# Altium PCB Machonap.PcbDoc
Units mil, origin at the board's own origin, x right, y up, seen from the top; angles counter-clockwise.
Board outline 3939.01 x 3151.6 mil, 2 copper layers (Top Layer, Bottom Layer), stack 62.205 mil thick; 26 components, 11 nets, 62 pads, 0 vias.
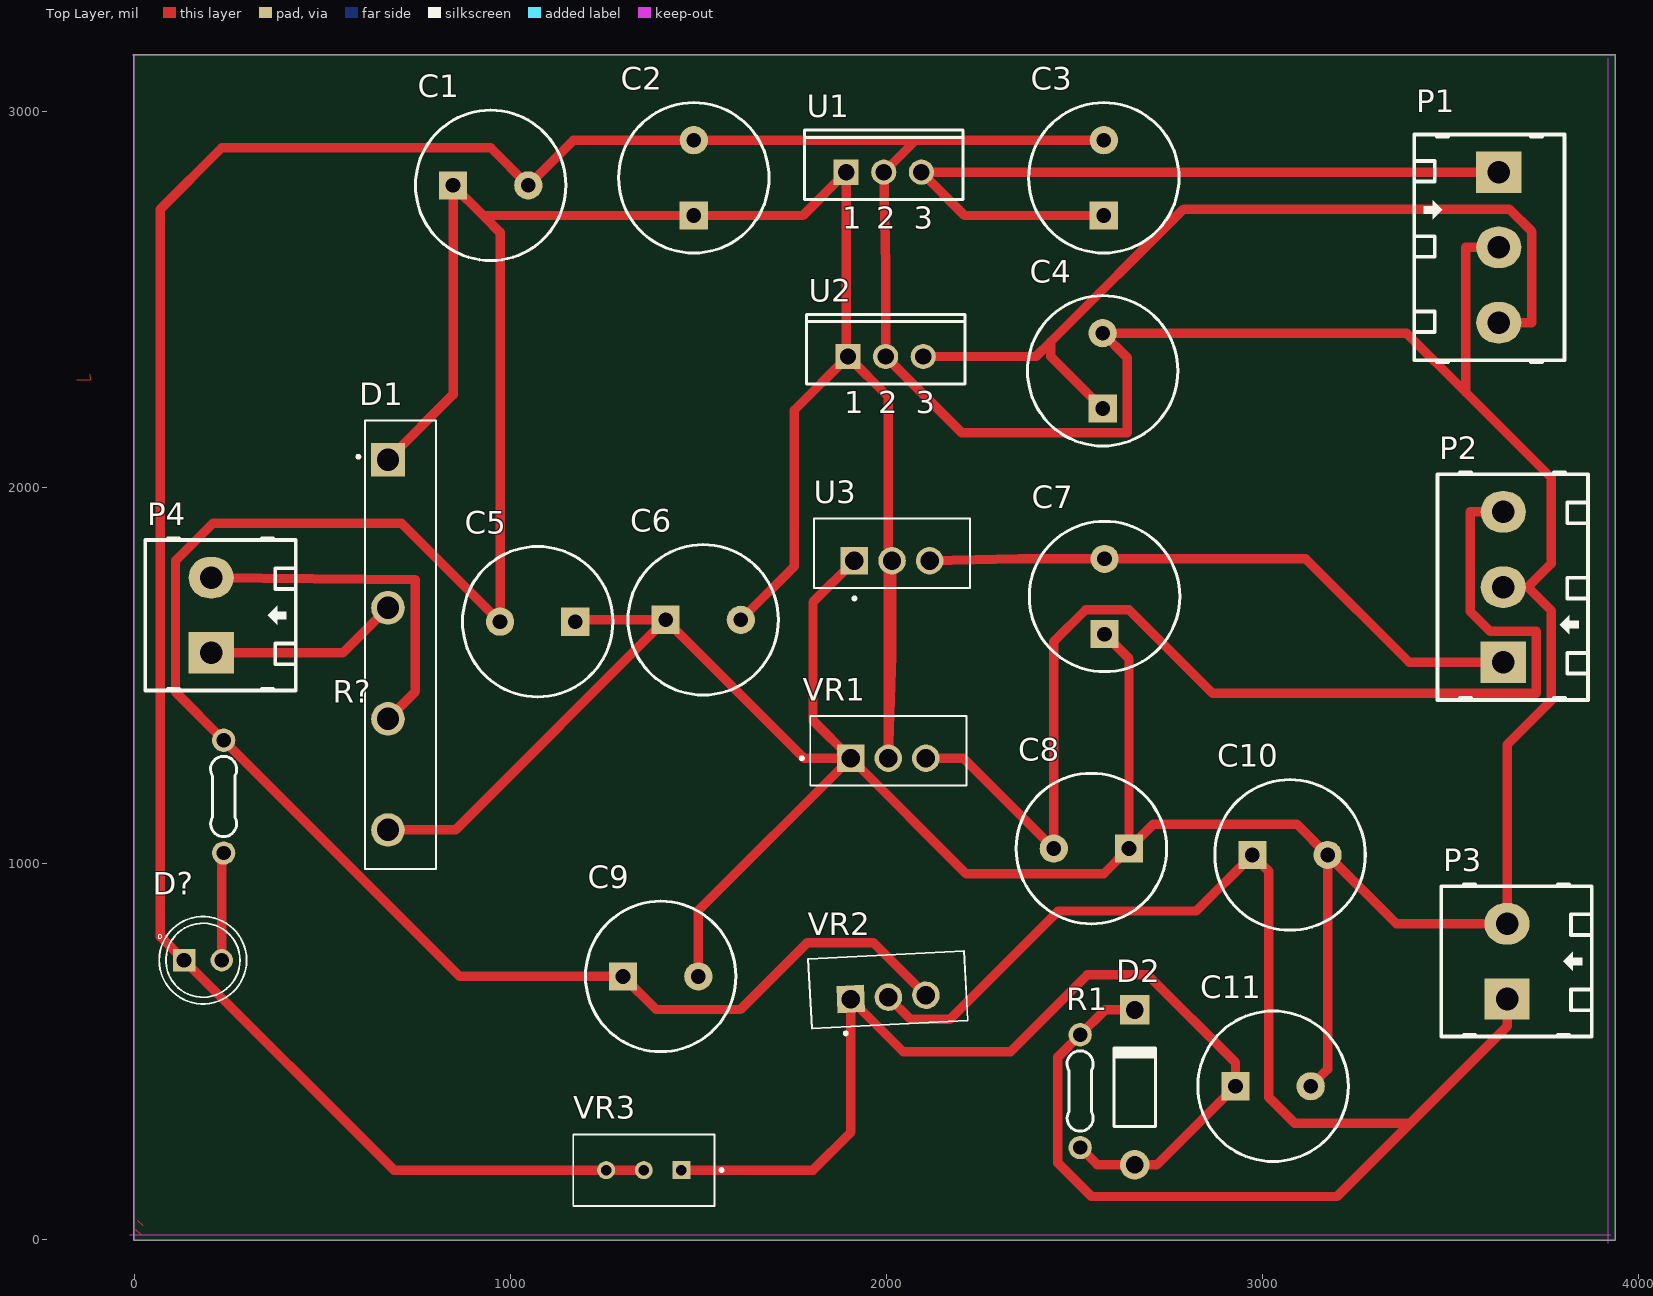
[diagram p0: Top Layer view]
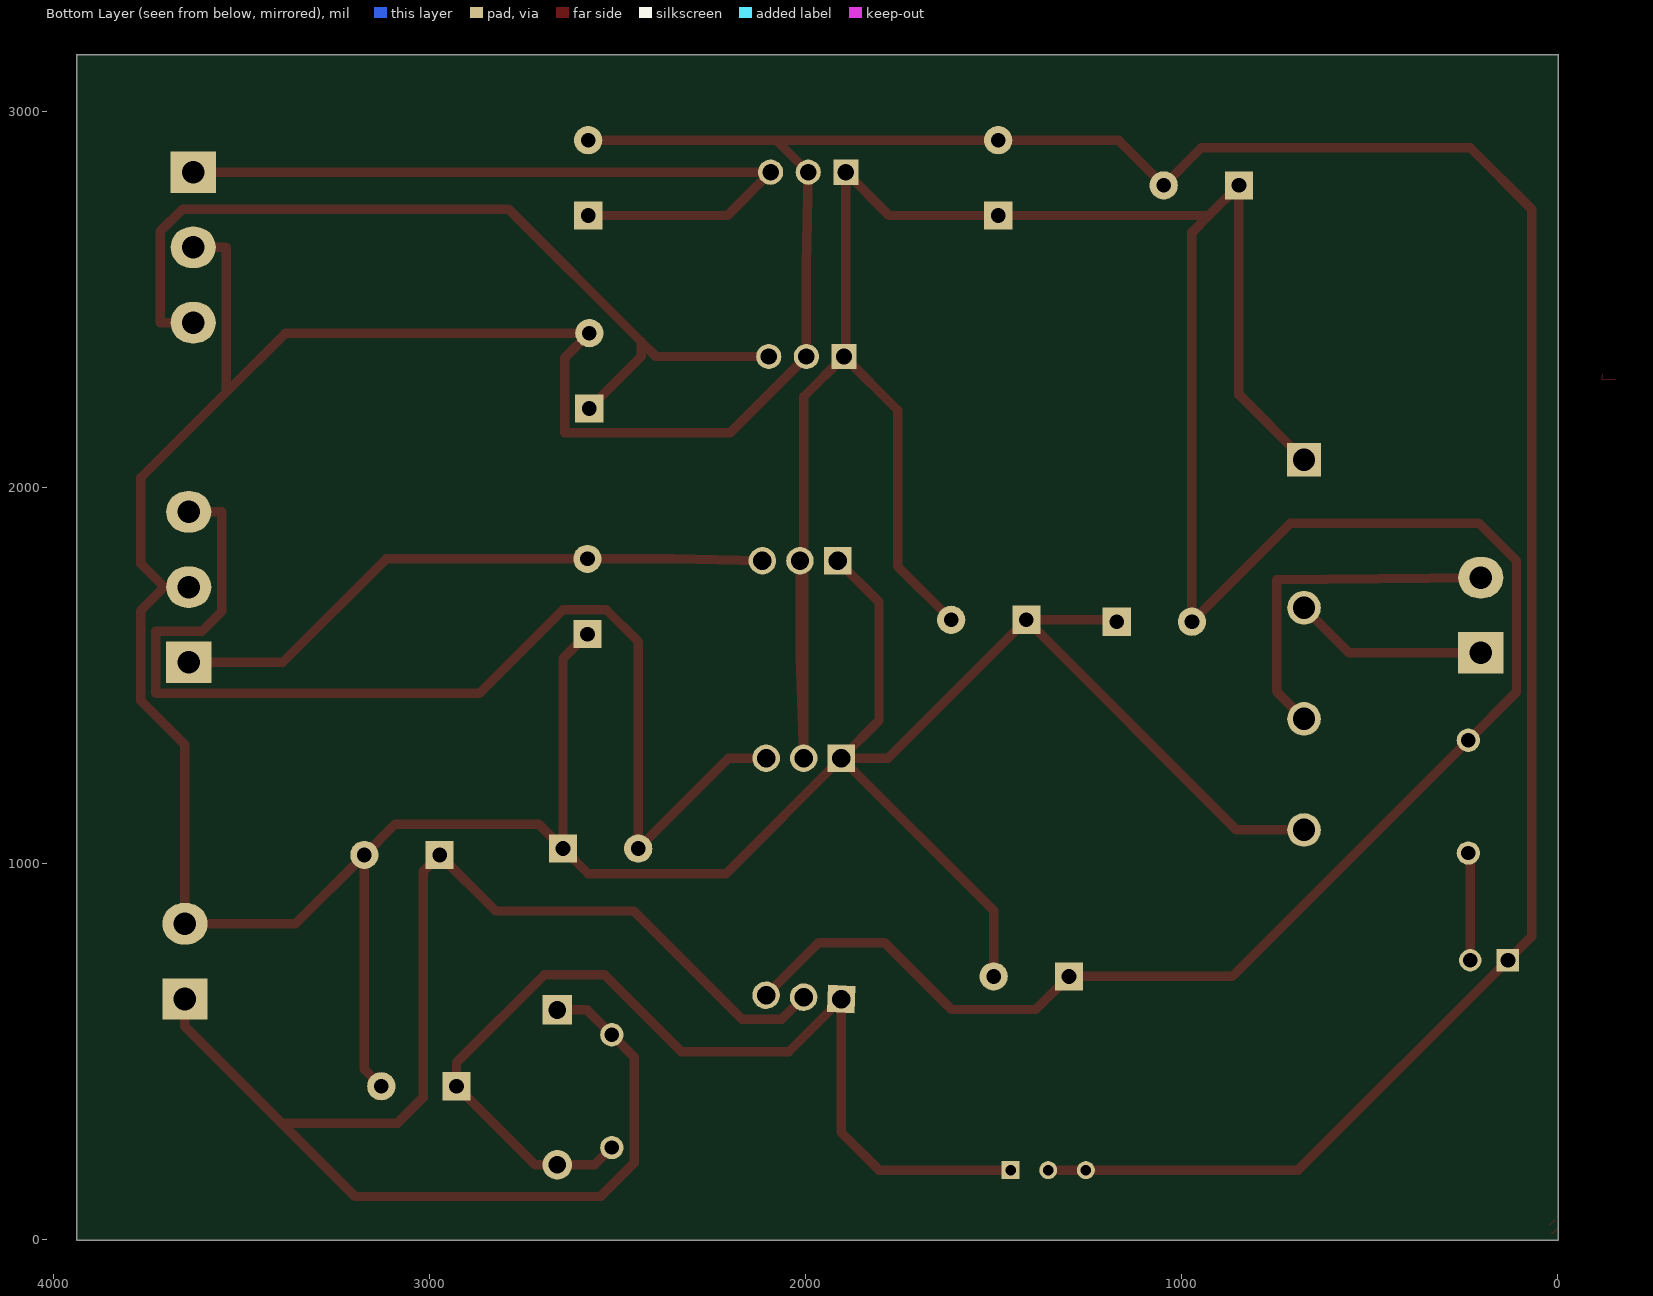
[diagram p1: Bottom Layer view, seen from below]

## Layer stack, top to bottom
Top Solder: solder mask 0.3937, Solder Resist, Dk 3.5
Top Layer: signal copper 1.378
Dielectric 1: dielectric 59.4488, FR-4, Dk 4.8
Bottom Layer: signal copper 1.378
Bottom Solder: solder mask 0.3937, Solder Resist, Dk 3.5

## Board outline
-1,0 ccw(c0,0) 0,-1 3937.01,-1 ccw(c3937.01,0) 3938.01,0 3938.01,3149.61 ccw(c3937.01,3149.61) 3937.01,3150.61 0,3150.61 ccw(c0,3149.61) -1,3149.61

## Design rules (kind name [scope] priority, off if disabled: settings)
Clearance [All] p1: gap=15 ignorepadtopadclearanceinfootprint=FALSE
PolygonConnect [All] p1: connectstyle=Relief reliefconductorwidth=10 reliefentries=4 polygonreliefangle="90 Angle" airgapwidth=10
RoomDefinition Sheet1 [InComponentClass('Sheet1')] p1: confinementstyle=ConfineIn formatcopy=TRUE lockcomponents=FALSE outline 1.46,5.87 3921.46,5.87 3921.46,3150.87 1.46,3150.87
RoutingLayers [All] p1: top layer_v5=TRUE bottom layer_v5=FALSE
RoutingVias [All] p1: holewidth=28 width=50 viastyle="Through Hole" minholewidth=28 minwidth=50 maxholewidth=28 maxwidth=50
SolderMaskExpansion [All] p1: expansion=4 istentingtop=FALSE
Width [All] p1: maxlimit=50 minlimit=15 preferedwidth=25
29 further rules are at their usual default settings.

## Components (designator, comment, footprint, x,y, rotation, side; value= is the part's Value field where it differs from the comment)
C1 "2200uF" CYL/D.400/LS.200 948,2803 r0 top
C2 "10uF" CYL/D.400/LS.200 1488,2823 r90 top
C3 "100uF" CYL/D.400/LS.200 2578,2823 r90 top
C4 "100uF" CYL/D.400/LS.200 2575,2310 r90 top
C5 "2200uF" CYL/D.400/LS.200 1073,1643 r180 top
C6 "10uF" CYL/D.400/LS.200 1513,1648 r0 top
C7 "100" CYL/D.400/LS.200 2580,1710 r90 top
C8 "100uF" CYL/D.400/LS.200 2545,1040 r180 top
C9 "0.1uF" CYL/D.400/LS.200 1400,700 r0 top
C10 "10uF" CYL/D.400/LS.200 3073,1023 r0 top
C11 "10uF" CYL/D.400/LS.200 3028,408 r0 top
D1 "GBJ2506-F" DIOB_GBJ2506-F 708.47,1581.58 r270 top
D2 "Diode" DO-41 2660,405 r90 top
D? "WP7113ID" LED_WP7113ID 183,743 r0 top
P1 "Header 3" HDR/Terminal/3 3628,2638 r270 top
P2 "Header 3" HDR/Terminal/3 3640,1735 r90 top
P3 "Header 2" HDR/Terminal/2 3650,740 r90 top
P4 "Header 2" HDR/Terminal/2 205,1660 r90 top
R1 "240" "R 1/4W/300" 2515,245 r90 top
R? "220" "R 1/4W/300" 238,1028 r90 top
U1 "7805" TO-220 1993,2838 r0 top
U2 "7812" TO-220 1998,2348 r0 top
U3 "LM7905" TO254P1054X470X1955-3#1 2015,1805 r0 top
VR1 "LM7912" TO254P1054X470X1955-3#1 2005,1280 r0 top
VR2 "LM317" TO254P1054X470X1955-3#2 2004.09,664.82 r3 top
VR3 "5K" TRIM_3296W-1-250 1355,185 r180 top

## Footprints (in the part's own frame and the unit in brackets; to place one, negate y for a bottom-side part, rotate by r counter-clockwise, add the part's x,y. Pads: shape width x height; smd on the part's side, far side on the other; paste and mask are expansions set on the pad)
CYL/D.400/LS.200 [mil]
  rect 75x75 hole 39: 1(-100,0)
  round 75 hole 39: 2(100,0)
  silkscreen extent -200,-200 200,200, body extent -198,-199 200,199, height 500
DIOB_GBJ2506-F [mm]
  rect 2.27x2.27 hole 1.51: 1(-12.5,-0.85)
  round 2.27 hole 1.51: 2(-2.5,-0.85) 3(5,-0.85) 4(12.5,-0.85)
  silkscreen extent -15.15,-2.95 15.15,2.4, body extent -15,-2.3 15,2.3, height 24.5
DO-41 [mm] "Diode, Axial; Body 5.2 x 2.7 mm (LxDia. max), Lead Dia. 0.86 mm (max)"
  round 2 hole 1.2: 1(-5.23,0)
  rect 2x2 hole 1.2: 2(5.23,0)
  silkscreen extent -2.65,-1.41 2.75,1.4
HDR/Terminal/2 [mil] "Header 2, 2 pin, hight 400mil, Pin to Pin 200mil, Colour Green"
  rect 110x120 hole 60: 1(-100,0)
  oval 110x120 hole 60: 2(100,0)
  silkscreen extent -200,-225 205,175, body extent -229,-218 200,168, height 559
HDR/Terminal/3 [mil]
  rect 110x120 hole 60: 1(-200,0)
  oval 110x120 hole 60: 2(0,0) 3(200,0)
  silkscreen extent -300,-225 305,175, body extent -329,-218 300,168, height 559
LED_WP7113ID [mm]
  round 1.508 hole 1: A(1.27,0)
  rect 1.508x1.508 / inner round 1.508 / far side rect 1.508x1.508 hole 1: C(-1.27,0)
  silkscreen extent -3.03,-2.95 2.95,2.95, body extent -2.5,-2.95 2.95,2.95, height 9.6
"R 1/4W/300" [mil] "Through hole resitor, axial 300mils, 1/4W"
  round 62 hole 38: 1(0,0) 2(300,0)
  silkscreen extent 44,-35 257,35, body extent -12,-47 312,47, height 97
TO254P1054X470X1955-3#1 [mm]
  rect 1.86x1.86 / inner round 1.86 / far side rect 1.86x1.86 hole 1.24: 1(-2.54,0)
  round 1.86 hole 1.24: 2(0,0) 3(2.54,0)
  silkscreen extent -5.27,-2.64 5.27,2.86, body extent -5.08,-2.35 5.08,2.35, height 15.49
TO254P1054X470X1955-3#2 [mm]
  rect 1.86x1.86 / inner round 1.86 / far side rect 1.86x1.86 hole 1.24: 1(-2.54,-0.51)
  round 1.86 hole 1.24: 2(0,-0.51) 3(2.54,-0.51)
  silkscreen extent -5.27,-2.9 5.27,2.35, body extent -5.08,-2.18 5.08,2.18, height 20.4
TO-220 [mm] "TO, Thru-Hole, Vertical, Heatsink Mounted; 3 In-Line Leads; Pitch 2.54 mm"
  rect 1.7x1.7 hole 1.1: 1(-2.54,0)
  round 1.7 hole 1.1: 2(0,0) 3(2.54,0)
  silkscreen extent -5.35,-1.85 5.35,2.85
TRIM_3296W-1-250 [mm]
  rect 1.218x1.218 / inner round 1.218 / far side rect 1.218x1.218 hole 0.71: 1(-2.54,0)
  round 1.218 hole 0.71: 2(0,0) 3(2.54,0)
  silkscreen extent -5.35,-2.41 4.76,2.42, body extent -4.76,-2.41 4.76,2.42, height 11.55

## Part data
C1 C2 C3 C4 C5 C6 C7 C8 C9 C10 C11: library part Capacitor, "Capacitor pol"
D1: "Bridge Rectifier Single Phase Standard 600 V Through Hole GBJ", PACKAGE="SIP-4 Diodes Incorporated", Availability="In Stock", Check_prices=https://www.snapeda.com/parts/GBJ2506-F/Diodes+Inc./view-part/?ref=eda, MF="Diodes Inc.", MP=GBJ2506-F, Price=None, Purchase-URL=https://pricing.snapeda.com/search/part/GBJ2506-F/?ref=eda, SnapEDA_Link=https://www.snapeda.com/parts/GBJ2506-F/Diodes+Inc./view-part/?ref=snap
D2: "Default Diode"
D?: "Red 617nm LED Indication - Discrete 2V Radial", PACKAGE="Radial Kingbright", Availability="In Stock", Check_prices=https://www.snapeda.com/parts/WP7113ID/Kingbright/view-part/?ref=eda, MF=Kingbright, MP=WP7113ID, Price=None, Purchase-URL=https://pricing.snapeda.com/search/part/WP7113ID/?ref=eda, SnapEDA_Link=https://www.snapeda.com/parts/WP7113ID/Kingbright/view-part/?ref=snap
P1 P2: "Header, 3-Pin"
P3 P4: "Header, 2-Pin"
R1 R?: library part Resistor, "Resistor"
U1 U2: library part 78xx, "LDO Fixed Voltage regulator"
  U1: ComponentLink1Description="New link"
U3: library part LM7905CT, "1.5-A, negative linear voltage regulator 3-TO-220 0 to 125", PACKAGE="TO-220-3 Texas Instruments", Check_prices=https://www.snapeda.com/parts/LM7905CT/Texas+Instruments/view-part/?ref=eda, MF="Texas Instruments", MP=LM7905CT, SnapEDA_Link=https://www.snapeda.com/parts/LM7905CT/Texas+Instruments/view-part/?ref=snap
VR1: library part LM7912CT/NOPB, "1.5-A, regulador de voltaje lineal negativo", PACKAGE="TO-220-3 Texas Instruments", Check_prices=https://www.snapeda.com/parts/LM7912CT/NOPB/Texas+Instruments/view-part/?ref=eda, MF="Texas Instruments", MP=LM7912CT/NOPB, SnapEDA_Link=https://www.snapeda.com/parts/LM7912CT/NOPB/Texas+Instruments/view-part/?ref=snap
VR2: library part LM317T, "Linear Voltage Regulator IC Positive Adjustable 1 Output 1.5A TO-220-3", PACKAGE="TO-220-3 ON", Check_prices=https://www.snapeda.com/parts/LM317T/Onsemi/view-part/?ref=eda, MF="ON Semiconductor", MP=LM317T, SnapEDA_Link=https://www.snapeda.com/parts/LM317T/Onsemi/view-part/?ref=snap
VR3: library part 3296W-1-250, "25 Ohms 0.5W, 1/2W PC Pins Through Hole Trimmer Potentiometer Cermet 25.0 Turn Top Adjustment", PACKAGE="NON STANDARD-3 Bourns", Availability="In Stock", Check_prices=https://www.snapeda.com/parts/3296W-1-250/Bourns/view-part/?ref=eda, MF=Bourns, MP=3296W-1-250, Price=None, Purchase-URL=https://pricing.snapeda.com/search/part/3296W-1-250/?ref=eda, SnapEDA_Link=https://www.snapeda.com/parts/3296W-1-250/Bourns/view-part/?ref=snap

## Nets (pads, with @x,y where several pads share a name; then routed paths per layer and width w, separated by ;. In a path a pad name is that pad's centre, name@x,y a point inside that pad or via, vN(x,y) a via of type N, cw(c..) or ccw(c..) an arc to the next point about the centre after c; other vN are vias at no path point)
GND: C1.2 C2.2 C3.2 C4.2 C5.1 C6.1 C7.1 C8.1 C9.2 C10.2 C11.2 D1.4 D?.C P1.2 P2.2 P3.2 U1.2 U2.2 U3.1 VR1.1 VR3.2 VR3.3 | length 17429.6
  Top Layer w25: D1.4 854.45,1089.45 C6.1 ; C5.1 1178,1648 C6.1 ; VR3.2 VR3.3 691,185 D?.C 70,806 70,2740 233,2903 948,2903 C1.2 1168,2923 C2.2 2078,2923 ; C9.2 1500,875 VR1.1 ; U3.1 1805,1695 1805,1380 VR1.1 ; C3.2 2078,2923 ; C7.1 2645,1545 C8.1 ; C11.2 3173,453 C10.2 ; P1.2 3540,2638 3540,2253 ; P2.2 3705,1735 ; C6.1 1781,1280 VR1.1 ; VR1.1 2212,973 2578,973 C8.1 ; 2078,2923 U1.2 1998,2588 U2.2 2201,2145 2640,2145 2640,2345 C4.2 3383,2410 3540,2253 ; C8.1 2710,1105 3091,1105 C10.2 ; C10.2 3356,840 P3.2 3650,1316 3767.5,1433.5 3767.5,1672.5 3705,1735 ; 3540,2253 3767.5,2025.5 3767.5,1797.5 3705,1735
NetC3_1: C3.1 P1.1 U1.3 | length 2067.6
  Top Layer w25: C3.1 2208,2723 U1.3 P1.1
NetC4_1: C4.1 P1.3 U2.3 | length 2369.4
  Top Layer w25: U2.3 2398,2348 2437,2387 ; C4.1 2437,2348 2437,2387 ; P1.3 3716,2438 3716,2680 3656,2740 2790,2740 2437,2387
NetC7_2: C7.2 P2.1 U3.3 | length 1639
  Top Layer w25: U3.3 2353,1810 C7.2 3115,1810 3390,1535 P2.1
NetC8_2: C8.2 P2.3 VR1.3 | length 3114.2
  Top Layer w25: VR1.3 2205,1280 C8.2 2445,1590 2530,1675 2645,1675 2867.5,1452.5 3727.5,1452.5 3727.5,1617.5 3605,1617.5 3552,1670.5 3552,1935 P2.3
NetC10_1: C10.1 D2.2 P3.1 R1.2 VR2.2 | length 4269.5
  Top Layer w25: VR2.2 2064.02,585.88 2169,585.88 2457.12,874 2824,874 C10.1 3017,979 3017,378 3085,310 3393,310 ; D2.2 2580.91,610.91 R1.2 2456,486 2456,204 2545,115 3198,115 3393,310 ; P3.1 3650,567 3393,310
NetC11_1: C11.1 D2.1 R1.1 VR2.1 VR3.1 | length 2689.1
  Top Layer w25: VR3.1 1805,185 1905.27,285.27 VR2.1 2044.81,500 2330,500 2534,704 2695,704 2928,471 C11.1 2719.09,199.09 D2.1 2560.91,199.09 R1.1
NetD1_2: D1.2 P4.1 | length 519.7
  Top Layer w25: P4.1 555,1560 D1.2
NetD1_3: D1.3 P4.2 | length 943.5
  Top Layer w25: P4.2 748,1755 748,1457.72 D1.3
NetD?_A: D?.A R?.1 | length 287.1
  Top Layer w25: D?.A 233,1023 R?.1
V+: C1.1 C2.1 C5.2 C6.2 C9.1 D1.1 R?.2 U1.1 U2.1 U3.2 VR1.2 VR2.3 | length 9811.3
  Top Layer w25: D1.1 848,2246.7 C1.1 928,2723 ; C6.2 1755,1790 1755,2205 U2.1 ; U3.2 2015,1553 VR1.2 2005,2241 U2.1 ; VR2.3 1965,790 1790,790 1612,612 1388,612 C9.1 866,700 R?.2 110,1456 110,1805 210,1905 711,1905 C5.2 973,2678 928,2723 ; 928,2723 C2.1 1778,2723 U1.1 1893,2353 U2.1
copper on no net: | length 89.3
  Top Layer w1.97: -152.79,2286.5 -117.02,2286.85 -117.79,2301.5 ; 3.04,28.32 17.27,15.11 ; 8.8,51.54 23.04,38.32

## Keep-outs
Top Layer:
  lines w1.97: -12,13 3925.01,13 ; -5,3149.61 3932.01,3149.61 ; 0,0 0,3149.61 ; 3918.47,-9.13 3918.47,3140.48

## Text inside footprints (layer, text, board x,y; h text height)
U1: Top Overlay "3" at 2073.32,2687.41 h59.06; Top Overlay "2" at 1973.32,2687.41 h59.06; Top Overlay "1" at 1883.16,2687.41 h59.06
U2: Top Overlay "3" at 2078.32,2197.41 h59.06; Top Overlay "2" at 1978.32,2197.41 h59.06; Top Overlay "1" at 1888.16,2197.41 h59.06